# EAGLE board ROZITA1 (EAGLE 6.4)
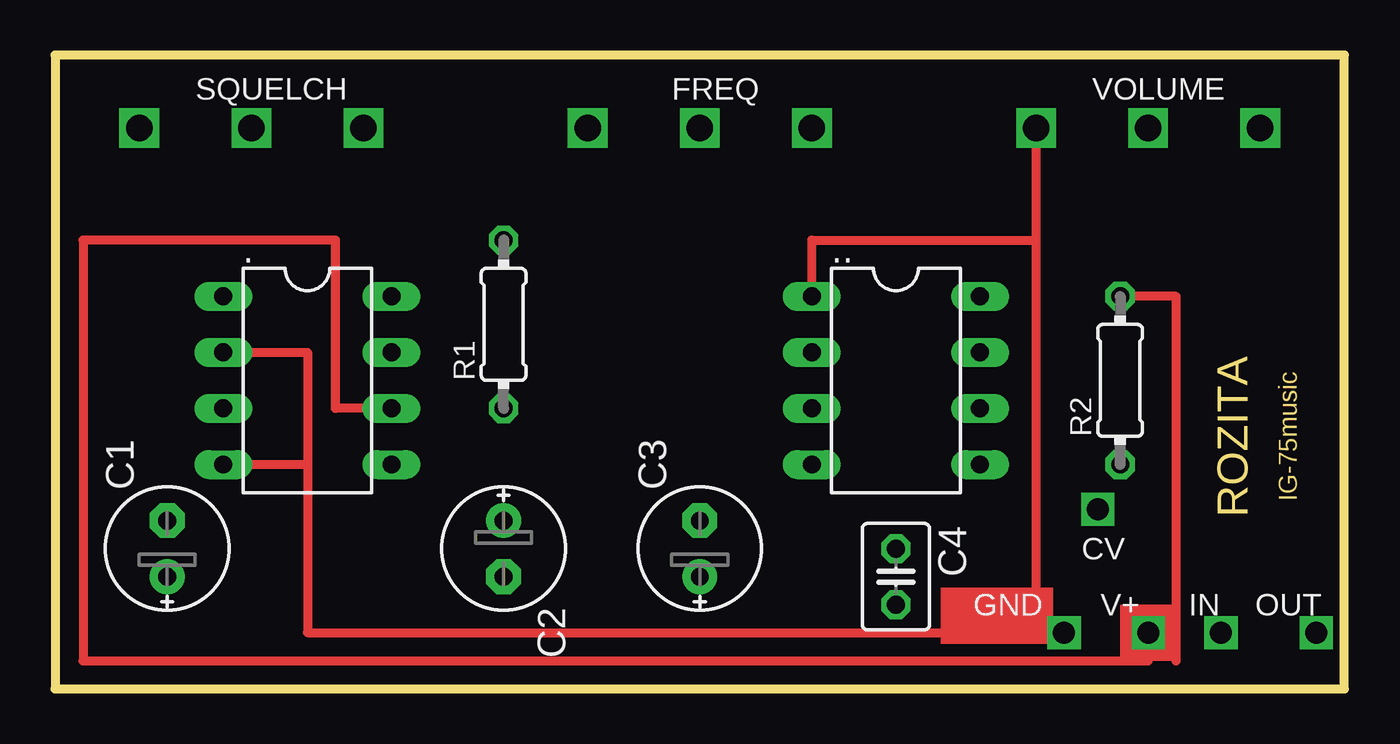
[diagram p0: board, top side]
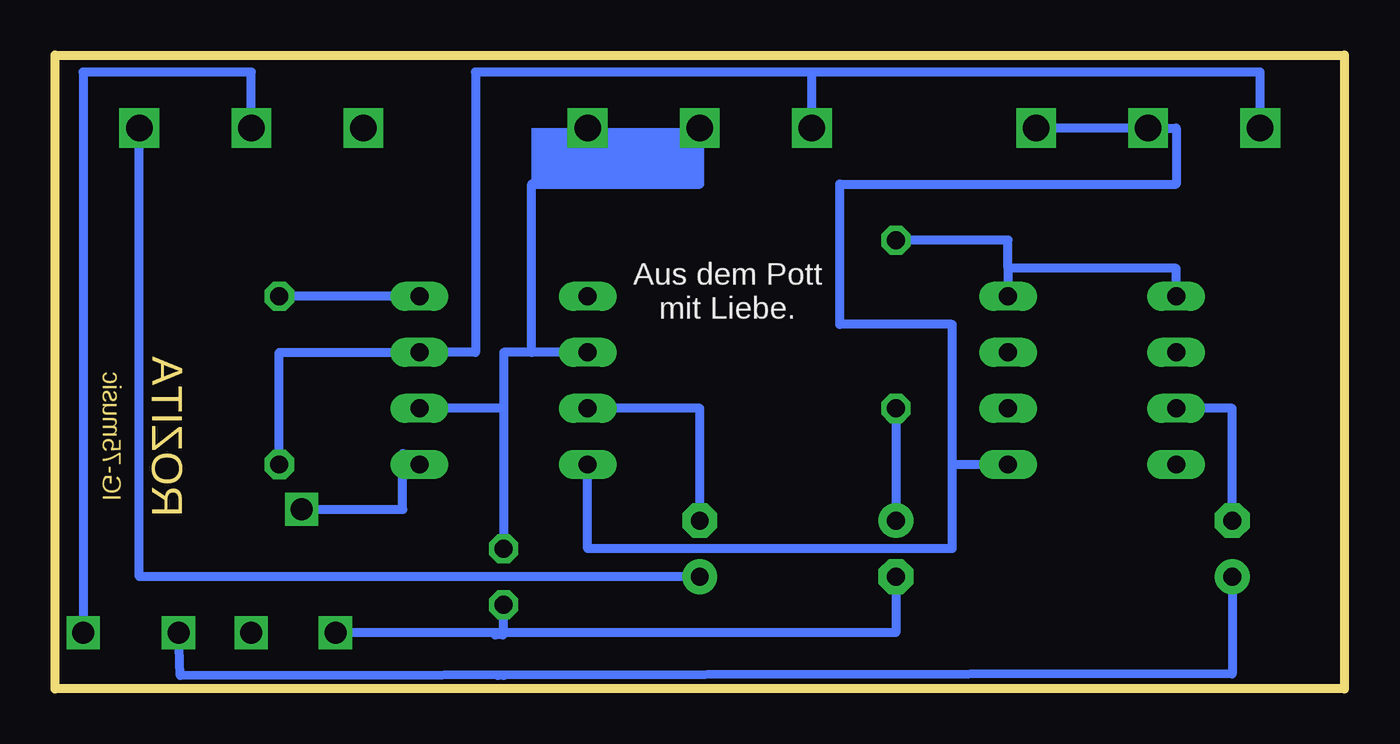
[diagram p1: board, bottom side, seen from below]

Size 58.42 x 28.7 mm. Coordinates in mm from the lower left corner, seen from the top.
Outline: 0,28.7 0,0 58.42,0 58.42,28.7 0,28.7
Copper layers (1*16): Top 0.035mm / dielectric 1.5mm / Bottom 0.035mm
Design rules "default": minimum track width 10mil, minimum drill 24mil, track to track 8mil, track to pad 8mil, pad to pad 8mil, via to via 8mil, smd to smd 8mil, copper to edge 40mil, drill to drill 8mil, minimum pad ring 10mil, minimum via ring 8mil, stop-mask expansion 4mil, vias tented up to drill 0mil, thermal gap 10mil

## Footprints (pad centres in the part's own frame; a part is rotated, then mirrored left to right if it is on the bottom)
DIL08 = drill 0.813 long: 1 -3.81,-3.81; 2 -1.27,-3.81; 3 1.27,-3.81; 4 3.81,-3.81; 5 3.81,3.81; 6 1.27,3.81; 7 -1.27,3.81; 8 -3.81,3.81
E2,5-6E = drill 0.813 pad 1.575: + -1.27,0 | drill 0.813 pad 1.575 octagon: - 1.27,0
C025-030X050 = drill 0.813 octagon: 1 -1.27,0; 2 1.27,0
0204/7 = drill 0.813 octagon: 1 -3.81,0; 2 3.81,0

## Placement (x,y rotation side)
.  386  [DIL08]  11.43,13.97 270 top
..  555  [DIL08]  38.1,13.97 270 top
C1  10uF  [E2,5-6E]  5.08,6.35 90 top
C2  [E2,5-6E]  20.32,6.35 270 top
C3  10uF  [E2,5-6E]  29.21,6.35 90 top
C4  33nF  [C025-030X050]  38.1,5.08 270 top
R1  100R  [0204/7]  20.32,16.51 90 top
R2  4k7  [0204/7]  48.26,13.97 90 top

## Library data of the parts
. .. = ic-package
C1-C4 R1 R2 = resistor

## Nets
S$1: ..1 ..8 R1.2
S$2: C2.+ R1.1
S$3: R2.2
S$4: ...3 C3.-
S$5: ..5 ...4
S$6: ...2 ...6 C4.1
S$7: C3.+
S$10: ..6
S$12: ..3 C1.-
S$16: C1.+
S$17: ..2 ..4 ...1 C2.-
S$18: ...7 R2.1

## Tracks (layer width: path | path; a pad name or v marks a point on that pad's centre or on a via)
S$1
  Bottom 0.406: ..1 7.62,19.05 15.24,19.05 | 15.24,19.05 ..8 | 15.24,19.05 15.24,20.32 R1.2
S$2
  Bottom 0.406: R1.1 C2.+
S$3
  Top 0.406: R2.2 50.8,17.78 50.8,1.27
  Bottom 0.406: 43.18,17.78 R2.2
S$4
  Bottom 0.406: C3.- 29.21,12.7 ...3
S$5  (via drill 1.2)
  Bottom 0.406: 17.78,10.16 17.78,16.51 22.86,16.51 22.86,22.86 7.62,22.86 7.62,25.4 v8.89,25.4 v13.97,25.4 | 17.78,10.16 17.78,6.35 34.29,6.35 ...4 | ..5 17.78,10.16
S$6  (via drill 1.2)
  Bottom 0.406: ...2 36.83,15.24 | 36.83,15.24 38.1,15.24 38.1,12.7 | 38.1,12.7 ...6 | 36.83,15.24 36.83,22.86 29.21,22.86 v29.21,25.4 | 38.1,12.7 C4.1
S$7  (via drill 1.2)
  Bottom 0.406: C3.+ 54.61,5.08 v54.61,25.4
S$8  (via drill 1, 1.2)
  Bottom 0.406: v49.53,25.4 49.53,27.94 57.15,27.94 | 57.15,27.94 v57.15,2.54 57.15,27.94
S$9
  Bottom 0.406: 38.13,3.72 38.13,2.45 38.47,2.45
S$10
  Top 0.406: ..6 12.7,12.7 12.7,20.32 1.27,20.32 1.27,1.27 49.53,1.27
S$11  (via drill 1)
  other vias: 49.53,2.54
S$12
  Bottom 0.406: C1.- 5.08,12.7 ..3
S$13
  Bottom 0.406: 38.1,0.61 38.37,0.61
S$14
  Bottom 0.406: 46.74,8.13 42.67,8.13 42.67,9.65 42.67,10.16 42.67,10.67
S$15  (via drill 1.2)
  other vias: 34.29,25.4
S$16  (via drill 1)
  Bottom 0.406: v52.83,2.54 52.75,0.59 5.08,0.68 C1.+
  other vias: 47.24,8.13
S$17  (via drill 1, 1.2)
  Top 0.406: ..2 11.43,15.24 11.43,10.16 | 11.43,10.16 ..4 | v44.45,25.4 44.45,20.32 | 44.45,20.32 44.45,2.54 | 44.45,2.54 v45.72,2.54 | ...1 34.29,20.32 44.45,20.32 | 11.43,10.16 11.43,2.54 44.45,2.54
  Bottom 0.406: C2.- 20.32,2.54 v45.72,2.54
S$18  (via drill 1.2)
  Bottom 0.406: v3.81,25.4 3.81,27.94 24.13,27.94 | 24.13,27.94 39.37,27.94 39.37,15.24 ...7 48.26,15.24 R2.1 | v24.13,25.4 24.13,27.94
(copper drawn outside any net)
  shapes: Bottom area x1, Top area x2

## Text on the board
Dimension: ROZITA | IG-75music
tNames: SQUELCH | FREQ | VOLUME | CV | GND | V+ | IN | OUT
bNames: Aus dem Pott / mit Liebe.